# EAGLE board untitled1 (EAGLE 6.4)
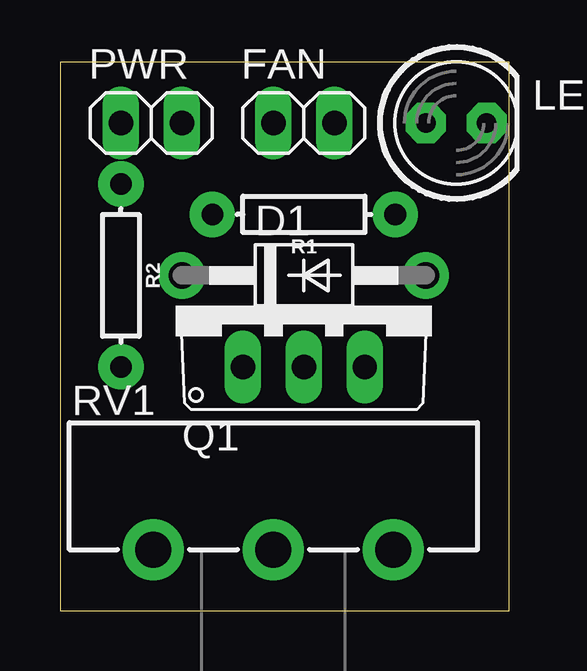
[diagram p0: board, top side]
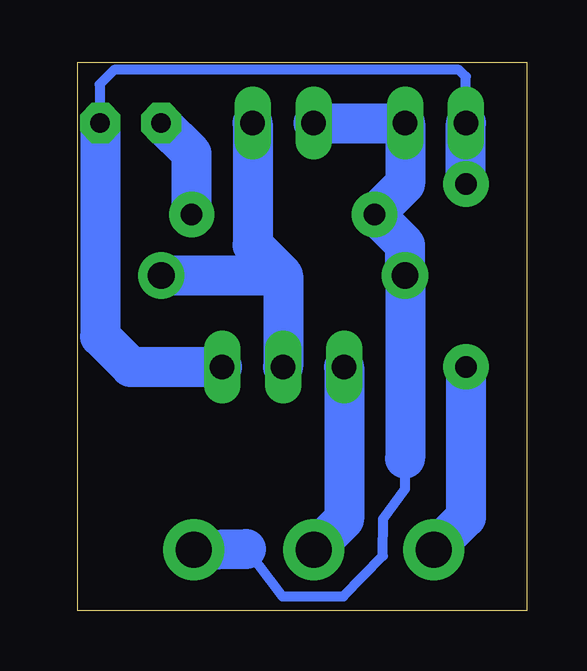
[diagram p1: board, bottom side, seen from below]

Size 18.72 x 22.85 mm. Coordinates in mm from the lower left corner, seen from the top.
Outline: 0,0 18.72,0 18.72,22.85 0,22.85 0,0
Copper layers (1*16): Top 0.035mm / dielectric 1.5mm / Bottom 0.035mm
Design rules "default": minimum track width 10mil, minimum drill 24mil, track to track 8mil, track to pad 8mil, pad to pad 8mil, via to via 8mil, smd to smd 8mil, copper to edge 40mil, drill to drill 8mil, minimum pad ring 10mil, minimum via ring 8mil, stop-mask expansion 4mil, vias tented up to drill 0mil, thermal gap 10mil

## Footprints (pad centres in the part's own frame; a part is rotated, then mirrored left to right if it is on the bottom)
DO41-10 = drill 1.118 pad 1.93: A 5.08,0; C -5.08,0
1X02 = drill 1.016 long: 1 -1.27,0; 2 1.27,0
LED5MM = drill 0.813 pad 1.676 octagon: A -1.27,0; K 1.27,0
TO220V = drill 1.016 long: 1 -2.54,-2.54; 2 0,-2.54; 3 2.54,-2.54
AXIAL-0.3 = drill 0.9 pad 1.88: P$1 -3.81,0; P$2 3.81,0
POT_ALPHA_RV16AF-20 = drill 1.5 pad 2.54: 1 -5,0; 2 0,0; 3 5,0

## Placement (x,y rotation side)
D1  1N4004  [DO41-10]  10.16,13.97 0 top
FAN  [1X02]  10.16,20.32 0 top
LED1  [LED5MM]  16.51,20.32 0 top
PWR  [1X02]  3.81,20.32 0 top
Q1  [TO220V]  10.16,12.7 0 top
R1  10M  [AXIAL-0.3]  10.16,16.51 180 top
R2  10M  [AXIAL-0.3]  2.54,13.97 270 top
RV1  [POT_ALPHA_RV16AF-20]  8.89,2.54 0 top

## Library data of the parts
D1 LED1 Q1 = adafruit
FAN PWR = pinhead
R1 R2 = SparkFun-Resistors; PROD_ID: RES-09327
RV1 = SparkFun-Retired; PROD_ID: RES-10002

## Nets
GND: LED1.K PWR.1 Q1.3 R2.P$1
N$1: R2.P$2 RV1.1
N$2: D1.A FAN.2 Q1.2
N$3: LED1.A R1.P$1
N$4: Q1.1 RV1.2
VCC: D1.C FAN.1 PWR.2 R1.P$2 RV1.3

## Tracks (layer width: path | path; a pad name or v marks a point on that pad's centre or on a via)
GND
  Bottom 0.406: R2.P$1 2.54,22.25 2.84,22.54 17.21,22.54 17.81,21.93 17.81,20.35 LED1.K
  Bottom 1.676: R2.P$1 PWR.1 | LED1.K 17.78,11.43 16.51,10.16 Q1.3
N$1
  Bottom 1.676: R2.P$2 2.54,3.89 RV1.1
N$2
  Bottom 1.676: FAN.2 11.43,15.24 10.16,13.97 | 10.16,13.97 Q1.2 | D1.A 10.16,13.97
N$3
  Bottom 1.676: R1.P$1 13.97,19.05 LED1.A
N$4
  Bottom 1.676: Q1.1 7.62,3.81 RV1.2
VCC
  Bottom 0.406: 11.7,2.58 10.19,0.59 7.65,0.59 6.01,2.28 5.99,3.83 5.08,5.08 5.08,6.35
  Bottom 1.676: FAN.1 PWR.2 5.08,17.78 R1.P$2 5.08,15.24 D1.C 5.08,6.35 | RV1.3 11.7,2.58